# Altium PCB SPI-无线无线充.PcbDoc
Units mm, origin at the board's own origin, x right, y up, seen from the top; angles counter-clockwise.
Board outline 54.33 x 73.61 mm, 2 copper layers (Top Layer, Bottom Layer); 41 components, 35 nets, 129 pads, 63 vias.
Unrouted connection lines stored in the file: 1.
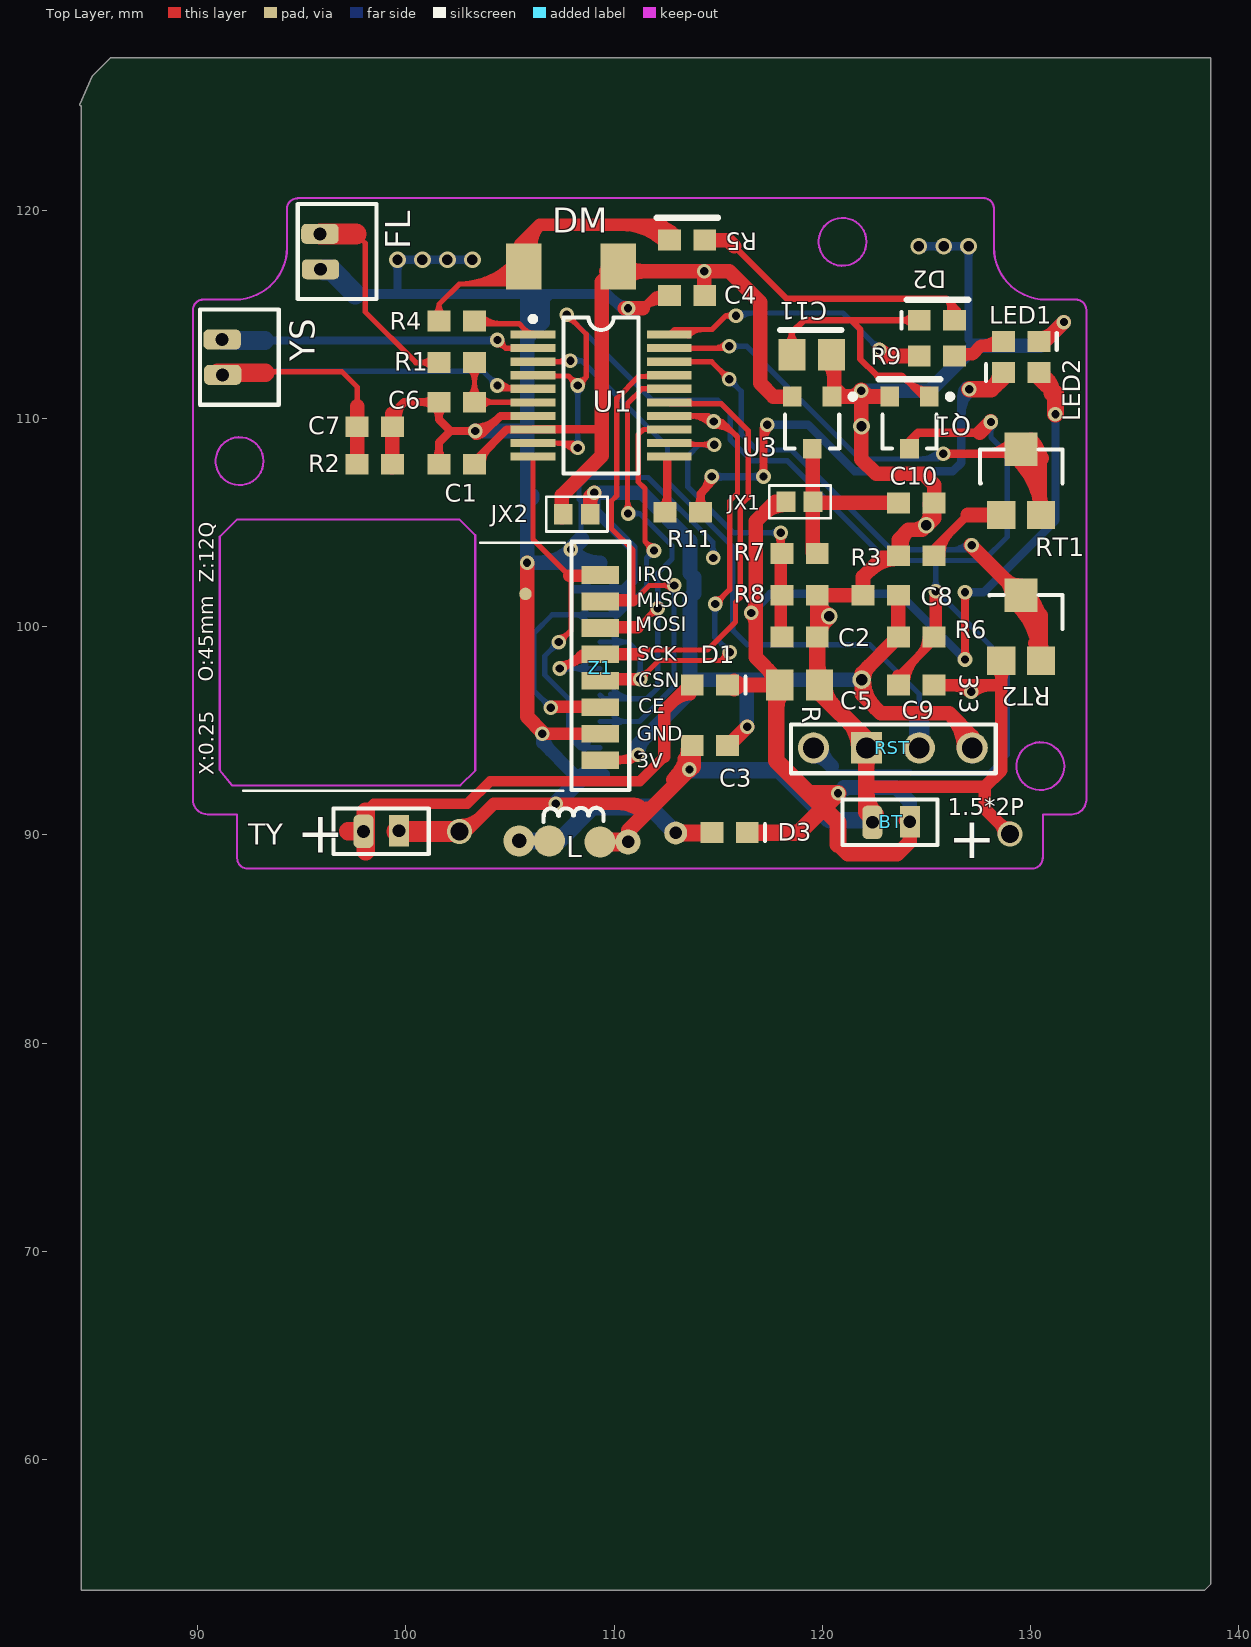
[diagram p0: Top Layer view]
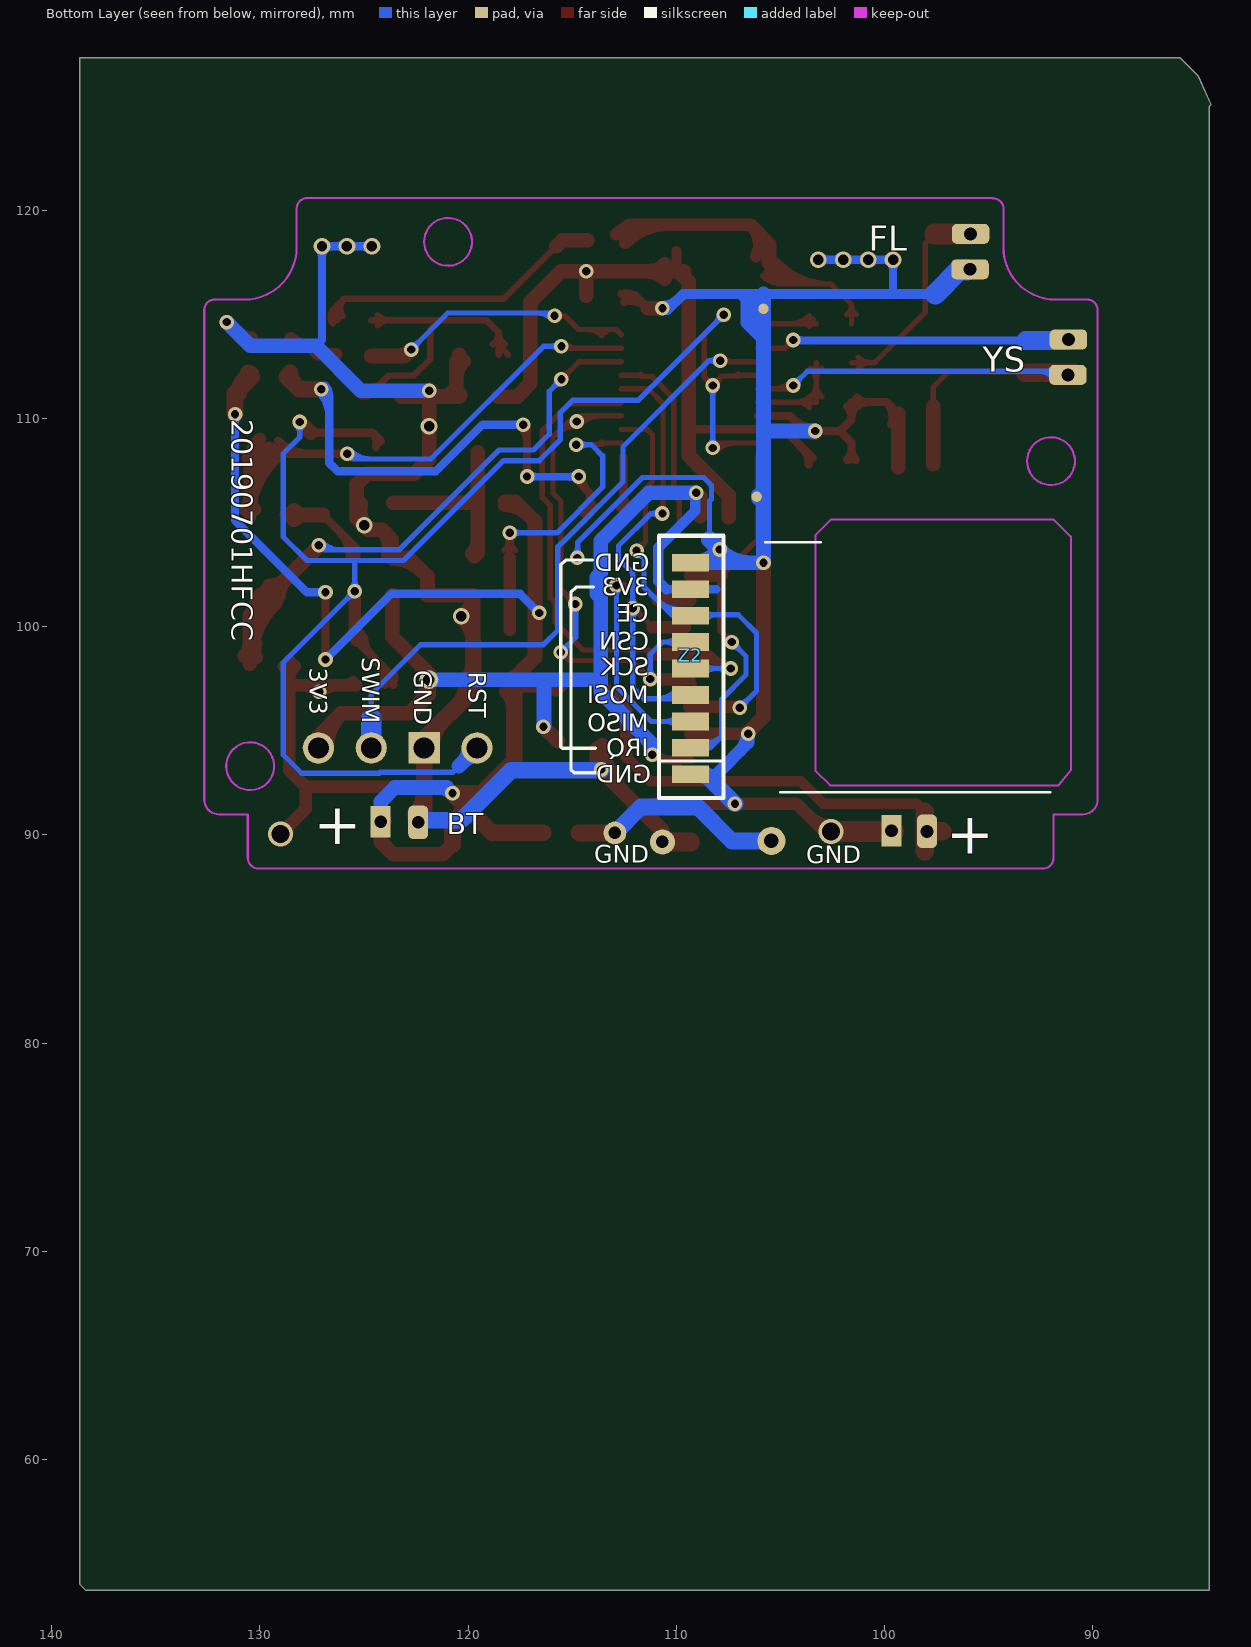
[diagram p1: Bottom Layer view, seen from below]

## Layer stack, top to bottom
Top Layer: signal copper 0.0356
Dielectric: dielectric 0.32, FR-4, Dk 4.8
Bottom Layer: signal copper 0.0356

## Board outline
84.328,125.07 84.404,124.993 84.404,53.721 138.354,53.721 138.659,54.026 138.659,127.33 85.827,127.33 84.938,126.441

## Design rules (kind name [scope] priority, off if disabled: settings)
Clearance [All] p1: gap=0.254
PolygonConnect [All] p1: connectstyle=Relief reliefconductorwidth=0.254 reliefentries=4 polygonreliefangle="90 Angle"
RoutingVias [All] p1: holewidth=0.711 width=1.27 viastyle="Through Hole" minholewidth=0.711 minwidth=1.27 maxholewidth=0.711 maxwidth=1.27
SilkscreenOverComponentPads [All] p1: minsilkscreentomaskgap=0.254
SolderMaskExpansion [All] p1: expansion=0.102
Width [All] p1: maxlimit=2 minlimit=0.254 preferedwidth=0.254 minimp=50.000000 maximp=50.000000 favimp=50.000000
27 further rules are at their usual default settings.

## Components (designator, comment, footprint, x,y, rotation, side; value= is the part's Value field where it differs from the comment)
BT "1.5*2P" MHDR1X2#1 123.932,90.635 r180 top
C1 "0.1uf" CR1608-0603 102.438,107.8 r180 top locked (schematic designator C6)
C2 "0.01uf" CR1608-0603 118.9,99.5 r180 top locked (schematic designator C12)
C3 "0.01uf" CR1608-0603 114.6,94.3 r0 top locked (schematic designator C10)
C4 "10uf" CR1608-0603 113.5,115.9 r180 top locked
C5 "33uf" CR2012-0805 118.9,97.2 r180 top locked (schematic designator R8)
C6 "0.01uf" CR1608-0603 102.438,110.782 r180 top locked
C7 "0.01uf" CR1608-0603 98.5,109.6 r0 top locked
C8 "0.1uf" CR1608-0603 122.8,101.509 r0 top locked
C9 "0.1uf" CR1608-0603 124.5,97.2 r180 top locked
C10 "10uf" CR1608-0603 124.5,105.943 r180 top locked (schematic designator C1)
C11 "33uf" CR2012-0805 119.482,113.055 r0 top locked (schematic designator R4)
D1 "SS14" CC1608-0603 114.6,97.2 r180 top (schematic designator D2)
D2 "SS14" CC1608-0603 125.5,114.716 r0 top locked (schematic designator 2D)
D3 "SS14" CC1608-0603 115.54,90.113 r180 top (schematic designator D2)
DM "3*4*2小龟按键" HDR1X2 111.8,115.3 r0 top locked (schematic designator FW)
FL "1.5*2P" MHDR1X2#2 95.872,118.7 r270 top locked (schematic designator BT)
JX1 "0" CR1005-0402 118.9,106 r180 top locked (schematic designator C3)
JX2 "0" CR1005-0402 108.2,105.4 r180 top locked (schematic designator C3)
LED1 "LED-R" CC1608-0603 129.55,113.7 r180 top locked (schematic designator R1)
LED2 "LED-G" CC1608-0603 129.55,112.2 r0 top locked (schematic designator R1)
Q1 "S8050" SO-G3/C2.5#1 124.181,109.8 r180 top locked (schematic designator U3)
R1 "1K" CR1608-0603 102.438,112.682 r0 top locked
R2 "1M" CR1608-0603 98.5,107.8 r0 top locked
R3 "100K" CR1608-0603 124.5,103.409 r0 top locked
R4 "10K" CR1608-0603 102.438,114.681 r0 top locked
R5 "1M" CR1608-0603 113.5,118.567 r0 top locked (schematic designator C4)
R6 "10K" CR1608-0603 124.5,99.5 r0 top locked (schematic designator R2)
R7 "180K" CR1608-0603 118.9,103.509 r0 top locked (schematic designator 7R)
R8 "360K" CR1608-0603 118.9,101.509 r180 top locked
R9 "1K" CR1608-0603 125.5,113 r0 top locked
R11 "470" CR1608-0603 113.3,105.5 r0 top locked (schematic designator R9)
RST "2.54*4" HDR1X4 119.572,94.182 r0 top locked (schematic designator Saoxie)
RT1 "50K" SO-G3/C2.5#2 129.54,107.264 r0 top locked (schematic designator U4)
RT2 "50K" SO-G3/C2.5#2 129.54,100.267 r0 top locked (schematic designator U4)
TY "1.5*2P" MHDR1X2#3 99.5,90.2 r180 top (schematic designator BT)
U1 "STM8L051F3P6" SSOP20 109.372,111.1 r270 top locked
U3 "XC6206 9v  6ua 250ma" SO-G3/C2.5#1 119.507,109.8 r180 top locked
YS "1.5*2P" MHDR1X2#2 91.172,113.63 r270 top locked (schematic designator BT)
Z1 "SI24R1" MHDR1X8 109.322,102.482 r270 top locked
Z2 "NRF24L01" MHDR1X8 109.322,94.182 r90 bottom locked

## Footprints (in the part's own frame and the unit in brackets; to place one, negate y for a bottom-side part, rotate by r counter-clockwise, add the part's x,y. Pads: shape width x height; smd on the part's side, far side on the other; paste and mask are expansions set on the pad)
CC1608-0603 [mm] "Chip Capacitor; Body 1.6 x 0.8 mm (LxW typ)"
  rect 1.1x1 smd: 1(-0.85,0) 2(0.85,0)
  silkscreen extent -1.7,-0.4 -1.7,0.4
CR1005-0402 [mm] "Ch"
  rect 0.9x1 smd: 1(-0.65,0) 2(0.65,0)
CR1608-0603 [mm] "Chip Resistor; Body 1.6 x 0.8 mm (LxW typ)"
  rect 1.1x1 smd: 1(-0.85,0) 2(0.85,0)
CR2012-0805 [mm] "Chip Resistor; Body 2.0 x 1.3 mm (LxW typ)"
  rect 1.3x1.5 smd: 1(-0.95,0) 2(0.95,0)
HDR1X2 [mm]
  rect 1.7x2.2 smd: 1(-6.147,2.004) 2(-1.6,2.004)
HDR1X4 [mm] "Connector; Header; 4 Position"
  round 1.5 hole 1: 1(0,0) 3(5.08,0) 4(7.62,0)
  rect 1.5x1.5 hole 1: 2(2.54,0)
  silkscreen extent -1.08,-1.22 8.75,1.12
MHDR1X2#1 [mm]
  rect 0.96x1.5 hole 0.62: 1(-0.264,0)
  rrect50% 0.96x1.6 hole 0.62: 2(1.536,0.026)
  silkscreen extent -1.6,-1.07 2.97,1.12
MHDR1X2#2 [mm]
  rrect50% 0.96x1.8 hole 0.62: 1(-0.164,0) 2(1.536,0.026)
  silkscreen extent -1.6,-1.07 2.97,2.72
MHDR1X2#3 [mm]
  rect 0.96x1.5 hole 0.62: 1(-0.164,0)
  rrect50% 0.96x1.6 hole 0.62: 2(1.536,0.026)
  silkscreen extent -1.6,-1.07 2.97,1.12
MHDR1X8 [mm] "Connector; Header; 8 Position"
  rect 0.85x1.8 smd: 1(0,0) 2(1.27,0) 3(2.54,0) 4(3.81,0) 5(5.08,0) 6(6.35,0) 7(7.62,0) 8(8.89,0)
  silkscreen extent -1.6,-1.36 10.33,1.4
SO-G3/C2.5#1 [mm]
  rect 0.9x0.95 smd: 1(-0.95,-1.25) 2(0.95,-1.25) 3(0,1.25)
  silkscreen extent -2.08,-1.37 1.3,1.25
SO-G3/C2.5#2 [mm]
  rect 1.35x1.35 smd: 1(-0.95,-1.9) 2(0.95,-1.9)
  rect 1.6x1.6 smd: 3(0,1.25)
  silkscreen extent -1.96,-0.38 1.99,1.25
SSOP20 [mm] "SSOP, Plastic; 20 Leads; Body Width 5.3 mm; Pitch 0.65 mm"
  rect 0.39x2.15 smd: 1(-2.925,-3.275) 2(-2.275,-3.275) 3(-1.625,-3.275) 4(-0.975,-3.275) 5(-0.325,-3.275) 6(0.325,-3.275) 7(0.975,-3.275) 8(1.625,-3.275) 9(2.276,-3.275) 11(2.925,3.275) 13(1.625,3.275) 15(0.325,3.275) 16(-0.325,3.275) 17(-0.975,3.275) 18(-1.625,3.275) 19(-2.275,3.275) 20(-2.925,3.275)
  rect 0.395x2.15 smd: 10(2.925,-3.275) 12(2.276,3.275) 14(0.975,3.275)
  silkscreen extent -3.8,-3.4 3.75,1.8

## Part data
C1 C2 C5 C6 C8 C10 LED1 LED2 R2 R6 R7 R8: library part Res3, "Resistor"
C3 C4 C7 C9 JX1 JX2 R5: library part "Cap Semi", "Capacitor (Semiconductor SIM Model)"
C11 D1 D2 D3 R1 R4: library part "Diode 1N4007", "1 Amp General Purpose Rectifier"
Q1 RT1 RT2 U3: library part QNPN, "NPN Bipolar Tra"
R3 R9 R11: library part "Cap Pol3"
RST: library part "Header 4", "Header, 4-Pin"
U1: library part ST6208CN6, "8-Bit ROM MCU with A/D Converter, Two Timers, Oscillator Safeguard and Safe Reset, 20-Pin SSOP, Industrial"

## Free pads (board coordinates)
  rect 1.8x0.85 smd far side: 0(109.322,92.912)
  round 1.35 hole 0.7: 1(105.435,89.713)
  round 1.2 hole 0.6: 1(110.668,89.662)
  round 1.1 hole 0.6: 1(112.954,90.094)
  round 0.9 hole 0.55: 1(121.884,97.46)
  round 1.5 smd: 3(105.435,89.713) 3(106.883,89.713) 3(109.322,89.662)
  round 0.6 smd: 3(105.74,101.575)
  round 0.5 smd far side: 4(105.816,115.265) 4(106.147,106.248)

## Via types
v1: diameter 0.7, hole 0.4, Top Layer to Bottom Layer, 51 vias
v2: diameter 0.8, hole 0.5, Top Layer to Bottom Layer, 10 vias
v3: diameter 1.2, hole 0.86, Top Layer to Bottom Layer, 2 vias

## Nets (pads, with @x,y where several pads share a name; then routed paths per layer and width w, separated by ;. In a path a pad name is that pad's centre, name@x,y a point inside that pad or via, vN(x,y) a via of type N, cw(c..) or ccw(c..) an arc to the next point about the centre after c; other vN are vias at no path point)
3V3: C1.1 C3.2 C4.1 C8.2 DM.2 JX2.1 JX2.2 pad.1@121.884,97.46 R6.1 RST.4 U1.8 U3.2 Z1.8 Z2.7 | length 99.9
  Top Layer w0.4: C1.1@103.448,108.113 103.474,108.113 104.834,109.473 U1.8@106.096,109.473 ; C1.1@103.638,107.8 cw(c104.789,107.8) 103.975,108.614 ; U1.8 109.474,109.475 ; Z1.8@109.322,93.599 110.795,93.599 ; Z1.8@109.956,93.433 cw(c110.357,93.032) 110.357,93.599 ; Z1.8@109.956,93.751 ccw(c110.323,94.118) 110.323,93.599 ; Z1.8@110.175,93.599 ccw(c110.175,94.828) v1@111.044,93.959 ; v1@111.126,93.705 ccw(c111.063,93.331) 110.795,93.599 ; v1(111.15,93.853) 111.049,93.853 110.795,93.599
  Top Layer w0.5: DM.2@109.995,117.17 DM.2@109.995,118.021
  Top Layer w0.7: JX2.2@107.493,105.247 107.493,106.299 109.398,108.204 109.398,116.573 DM.2@109.995,117.17 ; JX2.1@108.85,105.308 108.85,106.234 v1(109.042,106.426) ccw(c109.506,105.962) 108.85,105.962 ; DM.2@109.629,117.069 v1(114.325,117.069) ; DM.2@110.554,116.7 cw(c111.442,115.812) 111.442,117.069 ; DM.2@110.554,117.408 ccw(c111.372,118.226) 111.372,117.069 ; C4.1@114.325,115.9 v1(114.325,117.069) ; C3.2@115.684,94.5 v1(116.383,95.199) ; U3.2 117.652,111.05 117.018,111.684 117.018,115.57 115.519,117.069 v1(114.325,117.069) ; 122.262,98.132 ccw(c122.935,97.46) 121.984,97.46 ccw(c123.916,97.46) 122.55,96.094 ; C8.2 123.65,99.52 121.884,97.754 121.884,97.46 121.884,96.759 122.809,95.834 126.086,95.834 127.192,94.728 RST.4 ; 126.123,95.796 cw(c124.509,94.182) RST.4@126.792,94.182
  Bottom Layer w0.4: 108.078,101.802 110.491,101.802 ; Z2.7@108.688,101.643 ccw(c108.303,101.259) 108.303,101.802 ccw(c108.303,102.345) Z2.7@108.688,101.961 ; Z2.7@109.956,101.643 cw(c110.34,101.259) 110.34,101.802 cw(c110.34,102.345) Z2.7@109.956,101.961 ; RST.4@127.192,93.603 RST.4
  Bottom Layer w0.5: v1@108.971,106.355 cw(c108.678,106.062) 109.093,106.062 ; v1@109.093,106.426 109.093,105.562 110.871,103.784 110.871,102.182 110.491,101.802
  Bottom Layer w0.7: v1@109.093,106.426 111.336,106.426 113.64,104.122 113.64,102.568 113.832,102.376 113.832,101.586 113.64,101.394 113.64,96.85 111.15,94.361 v1(111.15,93.853) cw(c112.377,93.853) 111.51,94.72 ; 113.868,97.46 116.357,97.46 ; v1(116.383,95.199) 116.357,95.225 116.357,97.46 ; pad.1@121.884,97.46 116.357,97.46
4.2V: C10.2 JX1.1 R7.2 U3.3 | length 9.9
  Top Layer w0.39: JX1.1@119.532,106 JX1.1@119.589,105.943
  Top Layer w0.7: 119.532,104.176 ccw(c120.467,104.176) R7.2@119.806,103.515 ; U3.3@119.532,108.376 119.532,106 119.532,103.556 R7.2@119.71,103.378 ; JX1.1@119.589,105.943 C10.2@123.585,105.943
5V: D1.2 TY.2 | length 23
  Top Layer w0.5: 98.069,91.11 98.45,91.491 102.946,91.491 104.038,92.583 111.227,92.583 112.395,93.751
  Top Layer w0.6: 112.395,93.751 112.395,95.97 D1.2@113.65,97.225 ; 112.838,96.414 cw(c113.65,95.602) D1.2@113.65,96.75
  Top Layer w0.9: 97.231,90.174 TY.2@98.064,90.174 ; 98.069,89.23 98.069,91.11
BT: BT.1 C5.2 D1.1 D3.1 JX1.2 LED2.2 | length 80.5
  Top Layer w0.4: C5.2@117.78,97.2 C5.2 ; v1@126.742,98.531 ccw(c126.485,98.787) 126.848,98.787 ccw(c127.21,98.787) v1@126.954,98.531 ; v1@126.742,101.545 cw(c126.485,101.289) 126.848,101.289 cw(c127.21,101.289) v1@126.954,101.545 ; v1(126.848,98.425) v1(126.848,101.651)
  Top Layer w0.5: 117.768,96 117.78,96.012
  Top Layer w0.7: D1.1@115.55,97.2 C5.2@117.78,97.2 ; D1.1@115.762,96.988 cw(c116.274,96.476) 116.274,97.2 cw(c116.274,97.924) D1.1@115.762,97.412 ; 116.789,100.17 ccw(c116.095,100.17) v1(116.586,100.66) ccw(c116.095,101.151) 116.789,101.151 ; 117.114,105.38 cw(c118.25,104.244) JX1.2@118.25,105.85 ; C5.2@117.391,97.924 cw(c116.767,97.3) C5.2@117.65,97.3 ; C5.2@117.738,96.988 ccw(c117.226,96.476) 117.226,97.2 ccw(c117.226,97.924) C5.2@117.738,97.412 ; C5.2@117.78,97.536 116.789,98.527 116.789,105.054 117.735,106 JX1.2 ; 120.752,89.535 121.209,89.078 123.596,89.078 124.196,89.677 124.196,90.5 BT.1@123.996,90.7
  Top Layer w0.8: D3.1 118.866,90.113 120.053,91.3 ; 117.78,96.086 cw(c118.964,96.086) C5.2@118.127,96.923 ; C5.2@117.78,97.536 117.78,97.2 117.78,96.012 117.78,93.574 119.355,91.999 ; 120.752,89.535 120.752,90.602 120.053,91.3 ; LED2.2@130.4,112 131.013,111.387 131.013,111.379 131.191,111.201 v1(131.191,110.2) ; LED2.2@130.411,112.108 cw(c130.034,111.204) 131.013,111.204 ; LED2.2@130.412,112.107 cw(c130.044,111.211) 131.013,111.211 ; 130.797,111.603 cw(c131.395,112.2) LED2.2@130.55,112.2 ; 119.355,91.999 120.053,91.3 ; 119.355,91.999 v1(120.752,91.999) 120.053,91.3 ; LED2.2@130.55,112.2 ccw(c131.414,112.2) 130.803,111.589 cw(c131.414,112.2) LED2.2@130.55,112.2
  Bottom Layer w0.4: v1(116.586,100.66) 117.5,101.575 123.698,101.575 v1(126.848,98.425) ; v1@116.586,100.81 ccw(c116.586,101.172) 116.842,100.916 ccw(c117.098,100.66) v1@116.736,100.66 ; v1@126.698,98.425 ccw(c126.335,98.425) 126.592,98.681 ccw(c126.848,98.937) v1@126.848,98.575 ; v1(126.848,101.651) 127.737,101.651 131.191,105.105 v1@131.191,110.007 ; v1@126.954,101.545 cw(c127.21,101.289) 127.21,101.651 cw(c127.21,102.013) v1@126.954,101.757 ; v1@131.085,110.094 cw(c130.829,109.838) 131.191,109.838 cw(c131.553,109.838) v1@131.297,110.094
  Bottom Layer w0.7: 121.426,92.278 ccw(c121.426,91.324) v1(120.752,91.999) 121.031,92.278 123.52,92.278 124.196,91.602 BT.1
CE: U1.13 Z1.6 Z2.6 | length 28.1
  Top Layer w0.254: v1@111.689,103.657 ccw(c111.151,103.657) 111.532,104.038 ccw(c111.912,104.419) v1@111.912,103.88 ; v1(111.912,103.657) 111.481,104.089 111.481,106.629 111.15,106.959 111.15,109.22 111.405,109.475 U1.13
  Top Layer w0.6: v1@107.01,96.164 Z1.6@109.372,96.164
  Bottom Layer w0.254: v1@106.736,96.114 ccw(c106.198,96.114) 106.579,96.494 ccw(c106.959,96.875) v1@106.959,96.337 ; v1(106.959,96.114) 106.152,96.921 106.152,99.701 107.028,100.576 110.228,100.576 ; 108.021,100.576 cw(c108.021,99.706) Z2.6@108.636,100.321 ; 108.234,100.576 ccw(c108.234,101.145) Z2.6@108.636,100.743 ; Z2.6@109.797,100.576 ccw(c109.797,101.617) 110.533,100.881 ; Z2.6@109.797,100.83 ccw(c109.797,102.485) 110.967,101.315 ; Z2.6@110.057,100.677 ccw(c110.228,100.772) 110.228,100.576 ; Z2.6@110.087,100.464 cw(c110.228,100.431) 110.228,100.576 ; v1@111.69,103.646 cw(c111.235,103.624) 111.557,103.302 ; v1@111.901,103.435 ccw(c111.879,102.98) 111.557,103.302 ; v1(111.912,103.657) 111.557,103.302 ; 110.228,100.576 111.557,101.905 111.557,103.302
CSN: U1.14 Z1.5 Z2.5 | length 36.5
  Top Layer w0.254: Z1.5@109.144,97.257 Z1.5@109.372,97.485 ; v1(111.252,97.485) 112.141,98.374 115.138,98.374 v1(115.545,98.781) ; v1@111.252,97.708 ccw(c111.252,98.247) 111.633,97.866 ccw(c112.013,97.485) v1@111.475,97.485 ; U1.14 114.513,110.124 ; U1.14@113.594,110.124 cw(c113.594,108.666) v1@114.625,109.697 ; 114.207,110.124 cw(c114.207,109.279) v1@114.805,109.877 ; v1@114.568,109.915 ccw(c114.362,109.973) 114.513,110.124 ; v1@114.722,110.07 cw(c114.665,110.276) 114.513,110.124 ; v1@114.783,109.632 cw(c114.783,108.112) 115.857,109.187 ; v1@114.783,109.886 cw(c114.783,108.98) 115.423,109.621 ; v1(114.859,101.092) 115.545,101.778 115.545,106.027 115.926,106.408 115.926,109.118 115.189,109.855 ; v1@114.859,101.315 ccw(c114.859,101.853) 115.239,101.473 ccw(c115.62,101.092) v1@115.082,101.092 ; v1@114.971,109.735 cw(c115.189,109.596) 115.189,109.855 ; v1@114.971,109.975 ccw(c115.189,110.114) 115.189,109.855 ; v1@115.322,98.781 cw(c114.783,98.781) 115.164,98.4 cw(c115.545,98.019) v1@115.545,98.558 ; 114.513,110.124 v1(114.783,109.855) 115.189,109.855
  Top Layer w0.6: Z1.5@109.372,97.485 v1(111.252,97.485) ; Z1.5@109.885,97.314 cw(c110.299,96.899) 110.299,97.485
  Bottom Layer w0.254: Z2.5 110.669,99.262 111.252,98.679 v1(111.252,97.485) ; Z2.5@110.007,99.051 cw(c110.516,98.543) 110.516,99.262 cw(c110.516,99.981) Z2.5@110.007,99.473 ; v1@111.094,97.643 ccw(c110.714,98.024) 111.252,98.024 ccw(c111.79,98.024) v1@111.41,97.643 ; v1@114.701,100.934 cw(c114.382,100.615) 114.833,100.615 ; 114.833,100.492 cw(c115.458,100.492) v1@115.016,100.934 ; v1(114.859,101.092) 114.833,101.067 114.833,99.492 v1(115.545,98.781) ; v1@115.322,98.781 ccw(c114.783,98.781) 115.164,99.161 ccw(c115.545,99.542) v1@115.545,99.004
DM: DM.1 R4.1 R5.1 | length 32.8
  Top Layer w0.254: R4.1@101.348,114.967 ccw(c100.915,115.482) 101.588,115.482 ; R4.1@101.588,114.554 101.588,115.482 ; R4.1@101.828,114.967 cw(c102.261,115.482) 101.588,115.482 ; 103.16,116.459 ccw(c103.16,119.442) DM.1@105.314,117.378 ; 103.755,116.459 ccw(c103.755,118.872) DM.1@105.498,117.203 ; 104.35,116.459 ccw(c104.35,118.302) DM.1@105.681,117.027 ; DM.1@104.946,116.459 ccw(c104.946,117.732) DM.1@105.865,116.851 ; DM.1@105.131,117.554 cw(c102.565,120.012) 102.565,116.459 ; DM.1@105.156,117.142 105.156,116.56 105.054,116.459 102.565,116.459 ; 101.588,115.482 102.565,116.459
  Top Layer w0.6: DM.1@105.486,117.45 105.486,118.364 106.426,119.304 ; DM.1@105.608,117.533 cw(c106.546,117.964) 105.816,118.694 ; DM.1@106.153,117.783 cw(c107.382,118.347) 106.426,119.304 ; 110.339,119.304 cw(c110.339,116.306) R5.1@112.459,118.426 ; 111.787,119.304 cw(c111.787,117.755) R5.1@112.883,118.85 ; R5.1@112.413,118.637 ccw(c111.822,118.858) 112.268,119.304 ; R5.1@112.573,118.821 112.573,118.999 112.268,119.304 ; 106.426,119.304 112.268,119.304
  Top Layer w0.8: DM.1@105.156,117.12 DM.1@105.486,117.45
DM-D: R4.2 U1.1 | length 5.6
  Top Layer w0.254: R4.2@103.288,114.554 105.427,114.554 105.681,114.3 105.681,114.025 U1.1 ; R4.2@103.422,114.765 ccw(c103.932,115.275) 103.932,114.554 ccw(c103.932,114.087) R4.2@103.602,114.417 ; R4.2@103.602,114.945 ccw(c104.545,115.888) 104.545,114.554 ; 105.741,114.24 ccw(c106.097,114.597) U1.1@106.097,114.093
DYKG: 
DYKZ: 
FL: C6.1 R1.2 U1.6 | length 9
  Top Layer w0.254: C6.1@103.024,111.046 ccw(c102.387,111.682) 103.288,111.682 ccw(c104.188,111.682) C6.1@103.552,111.046 ; R1.2@103.024,112.418 cw(c102.387,111.782) 103.288,111.782 cw(c104.188,111.782) R1.2@103.552,112.418 ; R1.2 C6.1 104.673,110.782 104.681,110.774 U1.6 ; C6.1@103.602,110.518 cw(c104.238,109.881) 104.238,110.782 cw(c104.238,111.682) C6.1@103.602,111.046
FL-IN: FL.1 R1.1 | length 11.5
  Top Layer w0.254: 97.695,118.764 98.044,118.415 98.044,115.113 100.475,112.682 R1.1 ; R1.1@101.274,112.418 ccw(c100.638,111.782) 100.638,112.682 ccw(c100.638,113.583) R1.1@101.274,112.946
  Top Layer w1: FL.1 97.595,118.864
FL-RT: RT1.2 RT1.3 U1.19 | length 38.6
  Top Layer w0.254: U1.19@112.662,113.36 U1.19 115.432,113.375 v1(115.519,113.462) ; 114.77,113.375 ccw(c114.77,114.211) v1@115.362,113.619
  Top Layer w0.4: v1(125.806,108.306) RT1.3@129.489,108.306 ; v1@125.912,108.2 cw(c126.168,107.943) 126.168,108.306 cw(c126.168,108.668) v1@125.912,108.412 ; 127.588,108.306 ccw(c127.588,110.466) RT1.3@129.116,108.938 ; 128.554,108.306 ccw(c128.554,109.5) RT1.3@129.399,108.656 ; 128.595,108.306 cw(c128.595,107.569) RT1.3@129.116,108.09
  Top Layer w0.6: RT1.3@129.203,108.145 cw(c126.533,105.224) RT1.2@130.49,105.224 ; RT1.3@129.607,108.588 cw(c127.777,106.586) 130.49,106.586 ; RT1.3@130.012,109.031 cw(c129.022,107.947) 130.49,107.947 ; RT1.2@130.225,105.629 ccw(c129.585,106.27) 130.49,106.27 ccw(c131.395,106.27) RT1.2@130.755,105.629 ; RT1.2 130.49,108.092
  Top Layer w0.7: RT1.3@129.489,108.306 RT1.3@129.54,108.356
  Top Layer w0.8: RT1.3@129.753,108.175 cw(c130.069,107.671) 130.49,108.092 RT1.3@130.068,108.514
  Bottom Layer w0.254: v1(115.519,113.462) 116.383,113.462 121.793,108.052 125.552,108.052 v1(125.806,108.306) ; v1@115.677,113.304 cw(c116.058,112.923) 116.058,113.462 cw(c116.058,114) v1@115.677,113.619 ; 124.655,108.052 ccw(c124.655,109.457) v1@125.649,108.463 ; 125.268,108.052 ccw(c125.268,108.844) v1@125.828,108.284
GND: BT.2 C1.2 C2.1 C3.1 C4.2 C5.1 C6.2 C7.2 C8.1 C9.1 C10.1 C11.2 FL.2 LED1.1 pad.0 pad.1@110.668,89.662 pad.3@105.74,101.575 pad.3@109.322,89.662 pad.4 Q1.2 R2.2 R3.1 R8.1 RST.2 RT2.1 TY.1 U1.7 U3.1 Z1.7 Z2.8 | length 260.1
  Top Layer w0.39: C7.2@99.321,109.569 cw(c100.01,109.836) 99.487,110.359 ; 99.35,110.221 99.911,110.782 ; C7.2@99.684,109.71 cw(c100.62,110.072) 99.911,110.782 ; C6.2@101.322,110.566 ccw(c100.802,110.046) 100.802,110.782 ccw(c100.802,111.518) C6.2@101.322,110.998 ; C1.2@101.372,108.016 ccw(c100.852,108.536) 101.588,108.536 ccw(c102.324,108.536) C1.2@101.804,108.016 ; C6.2@101.372,110.566 cw(c100.852,110.046) 101.588,110.046 cw(c102.324,110.046) C6.2@101.804,110.566 ; C1.2@101.588,108.039 101.588,108.852 102.133,109.398 ; v1@103.218,109.288 ccw(c102.953,109.024) 102.953,109.398 ccw(c102.953,109.772) v1@103.218,109.507 ; v1@103.327,109.163 ccw(c103.327,109.761) 103.75,109.338 ; v1@103.327,109.553 ccw(c103.327,111.092) 104.416,110.004 ; v1@103.437,109.288 cw(c103.701,109.024) 103.701,109.398 cw(c103.701,109.772) v1@103.437,109.507 ; U1.7 104.537,110.125 103.81,109.398 v1(103.327,109.398) 102.133,109.398 ; v1@110.515,115.291 v1(110.668,115.291) ; 111.849,115.772 cw(c112.419,115.203) C4.2@112.621,115.982 ; 111.977,115.9 111.367,115.291 cw(c112.22,114.438) C4.2@112.523,115.605 ; RT2.1@128.25,98.028 cw(c127.431,97.208) 128.59,97.208 cw(c129.749,97.208) RT2.1@128.929,98.028 ; 128.59,97.18 RT2.1 ; 99.911,110.782 C6.2 101.588,109.943 102.133,109.398
  Top Layer w0.6: v3(102.565,90.17) 102.895,90.17 104.216,91.491 110.947,91.491 ; v3@102.565,90.47 ccw(c102.565,91.991) 103.641,90.916 ; v1@106.553,94.931 106.622,94.862 Z1.7 ; 110.174,91.491 cw(c110.174,89.674) 111.459,90.959 ; 111.401,91.08 ccw(c110.947,91.035) 110.947,91.491 ; 111.565,91.297 cw(c111.442,91.985) 110.947,91.491 ; 122.352,92.304 127.787,92.304 ; C9.1@125.374,97.18 128.59,97.18 ; C9.1@125.541,97.341 ccw(c125.93,97.73) 125.93,97.18 ; 126.296,97.18 cw(c126.296,96.019) v1@127.117,96.84 ; v1@127.188,96.84 cw(c128.009,96.019) 128.009,97.18 ; RT2.1@128.325,98.102 cw(c127.685,97.462) 128.59,97.462 cw(c129.495,97.462) RT2.1@128.855,98.102 ; RT2.1 128.59,93.106 127.787,92.304 ; v3@128.707,90.043 ccw(c127.982,90.043) 128.494,90.555 ccw(c129.007,91.067) v3@129.007,90.343 ; v3(129.007,90.043) 127.787,91.262 127.787,92.304
  Top Layer w0.7: R2.2@99.35,107.66 99.35,110.221 ; v1(105.816,103.072) 105.816,95.668 v1@106.553,94.931 ; v1@110.515,115.291 111.367,115.291 ; 111.658,91.211 110.668,90.221 110.668,89.662 110.668,90.17 v1@113.767,93.269 ; 112.847,92.657 cw(c113.816,91.973) v1(113.614,93.142) ; 112.901,92.734 ccw(c111.335,94.3) C3.1@113.55,94.3 ; 113.094,92.926 cw(c113.614,92.406) v1(113.614,93.142) ; 113.403,93.648 ccw(c113.866,93.544) v1(113.614,93.142) ; 113.767,93.599 ccw(c114.148,93.218) v1(113.614,93.142) ; C2.1@119.75,99.129 cw(c121.532,99.129) v2@120.359,100.47 ; C2.1@119.75,99.255 R8.1 ; C2.1@119.75,99.709 C2.1 119.761,99.489 119.761,101.295 ccw(c120.523,101.295) v2@120.338,100.556 ; C2.1@119.761,99.343 cw(c121.122,99.343) v2@120.354,100.467 ; C11.2@120.219,112.743 cw(c119.364,111.888) 120.574,111.888 ; v2@120.348,100.553 cw(c120.814,101.509) R8.1 ; U3.1@120.386,111.146 ccw(c119.934,111.598) 120.574,111.598 ; U3.1@120.432,111.054 121.006,111.054 ; C11.2 120.432,112.605 120.574,112.748 120.574,111.486 121.006,111.054 ; 121.208,111.054 ccw(c121.208,111.99) v1(121.869,111.328) ccw(c122.531,111.99) 122.531,111.054 ; 122.263,102.705 cw(c123.6,101.369) R3.1@123.6,103.259 ; 122.996,103.309 ccw(c122.996,104.013) R3.1@123.494,103.515 ; Q1.2@123.205,111.054 v1@121.869,111.054 ; R3.1@123.843,103.455 cw(c124.961,103.817) 124.13,104.648 ; 124.321,104.648 ccw(c124.321,105.549) 124.958,104.912 ccw(c123.985,105.885) C10.1@125.361,105.885 ; C10.1@125.154,105.91 cw(c123.83,105.608) v2@124.79,104.648 ; LED1.1@130.45,113.85 ccw(c130.45,114.737) 131.077,114.11 ; LED1.1@130.503,113.536 v1(131.597,114.63) ; R8.1 C8.1 121.95,102.392 122.867,103.309 123.661,103.309 123.661,104.179 124.13,104.648 ; 121.006,111.054 v1@121.869,111.054 ; v1@121.869,111.054 121.869,108.052 122.58,107.34 124.841,107.34 125.361,106.82 125.361,105.219 v2@124.79,104.648 ; 124.13,104.648 v2@124.79,104.648
  Top Layer w0.8: v1(113.614,93.142) v1@113.614,93.167 ; v1@113.767,93.269 C3.1@113.767,94.106 ; 119.75,98.145 ccw(c120.695,98.145) C5.1@120.027,97.477 ; C2.1@119.75,99.255 119.75,96.963 122.112,94.601 RST.2 122.112,91.088 BT.2@122.5,90.7 ; C5.1@120.1,97.1 ccw(c121.276,97.1) 120.445,96.268 ; 121.218,95.494 cw(c119.906,94.182) RST.2@121.762,94.182 ; RST.2@121.865,93.935 cw(c121.267,93.337) 122.112,93.337 cw(c122.957,93.337) RST.2@122.36,93.935 ; v1@121.869,111.054 v1(121.869,111.328) ; 122.112,92.049 ccw(c123.615,92.049) BT.2@122.552,90.986
  Top Layer w0.9: pad.3@109.322,89.662 pad.1@110.668,89.662
  Top Layer w1: TY.1@99.564,90.17 v3(102.565,90.17)
  Bottom Layer w0.254: 108.407,104.191 108.407,106.027 108.311,106.123 108.311,106.787 108.687,107.163 111.633,107.163 114.732,104.064 114.732,103.327 v1(114.757,103.302) ; v1@114.6,103.459 ccw(c114.28,103.779) 114.732,103.779 ; 114.732,103.901 ccw(c115.357,103.901) v1@114.915,103.459
  Bottom Layer w0.4: v2@99.452,117.486 cw(c99.111,117.145) 99.593,117.145 cw(c100.076,117.145) 99.735,117.486 cw(c100.076,117.145) 100.076,117.627 cw(c100.076,118.11) v2@99.735,117.769 ; 99.517,115.976 99.593,116.053 v2(99.593,117.627) v2(100.793,117.627) v2(101.993,117.627) v2(103.193,117.627) ; v2@100.652,117.486 ccw(c100.311,117.145) 100.311,117.627 ccw(c100.311,118.11) v2@100.652,117.769 ; v2@100.935,117.486 cw(c101.276,117.145) 101.276,117.627 cw(c101.276,118.11) v2@100.935,117.769 ; v2@101.852,117.486 ccw(c101.511,117.145) 101.511,117.627 ccw(c101.511,118.11) v2@101.852,117.769 ; v2@102.135,117.486 cw(c102.476,117.145) 102.476,117.627 cw(c102.476,118.11) v2@102.135,117.769 ; v2@103.052,117.486 ccw(c102.711,117.145) 102.711,117.627 ccw(c102.711,118.11) v2@103.052,117.769 ; v2(124.619,118.262) v2(125.819,118.262) v2(127.019,118.262) 127.019,113.773 127.305,113.487 ; v2@124.76,118.121 cw(c125.101,117.78) 125.101,118.262 cw(c125.101,118.745) v2@124.76,118.404 ; v2@125.677,118.121 ccw(c125.336,117.78) 125.336,118.262 ccw(c125.336,118.745) v2@125.677,118.404 ; v2@125.96,118.121 cw(c126.301,117.78) 126.301,118.262 cw(c126.301,118.745) v2@125.96,118.404 ; v2@126.877,118.404 cw(c126.536,118.745) 126.536,118.262 cw(c126.536,117.78) 126.877,118.121 cw(c126.536,117.78) 127.019,117.78 cw(c127.501,117.78) v2@127.16,118.121
  Bottom Layer w0.5: FL.2@95.898,117.264 FL.2@96.04,117.122 ; 97.565,115.976 99.517,115.976 105.816,115.976 106.375,115.976 ; TY.1@99.636,89.916 TY.1@99.636,89.941 ; 105.816,113.741 106.68,114.605 106.68,115.748 106.909,115.976 ; 105.924,115.525 ccw(c106.184,115.265) pad.4@105.816,115.265 ; 105.943,114.959 ccw(c105.51,114.959) pad.4@105.816,115.265 ; 106.147,115.468 105.943,115.265 105.943,114.3 106.375,114.732 106.375,115.976 ; 108.078,92.912 108.939,92.912 pad.0 pad.0@109.546,92.912 ; 109.977,115.677 ccw(c110.668,116.368) v1@110.668,115.391 ; v1(110.668,115.291) 110.515,115.291 110.439,115.214 109.677,115.976 106.909,115.976 ; pad.4@105.816,115.265 105.816,115.418 106.375,115.976 ; 106.375,115.976 106.909,115.976
  Bottom Layer w0.6: v1(106.553,94.862) 106.553,94.437 108.078,92.912 ; v1@106.603,94.862 ccw(c107.749,94.862) 106.939,94.051 ; pad.0@108.609,92.912 pad.0@108.939,92.912
  Bottom Layer w0.7: v1(103.327,109.398) 105.791,109.398 ; 105.816,105.692 cw(c106.702,105.692) pad.4@106.076,106.319 ; 105.816,106.804 ccw(c106.702,106.804) pad.4@106.076,106.177 ; pad.4@105.816,115.265 105.816,113.741 v1(105.816,103.072) Z2.8 cw(c109.322,104.924) v1(107.925,103.708) cw(c106.389,105.244) 106.389,103.072 ; pad.4@105.816,115.418 105.816,115.976 ; v1(121.869,111.328) 125.146,111.328 127.305,113.487 130.454,113.487 v1(131.597,114.63)
  Bottom Layer w0.8: v1(107.188,91.491) pad.0@108.609,92.912 ; v1(107.925,103.708) 108.407,104.191 ; 108.399,92.701 cw(c108.847,92.254) pad.0@108.847,92.887 ; v1@113.614,93.1 117.949,93.1 120.349,90.7 BT.2@122.496,90.7
  Bottom Layer w1: FL.2@96.04,117.122 96.419,117.122 97.565,115.976
  other v1: 127.152,96.876
  other v2: 120.326,100.508 124.993,104.877 121.875,109.626
IRQ: U1.10 Z1.1 Z2.1 | length 22.5
  Top Layer w0.254: U1.10 106.097,104.189 107.848,102.438 ; v1@107.34,99.486 ccw(c107.34,100.086) 107.764,99.662 ; v1@107.353,99.251 107.925,99.822 107.925,102.159 108.204,102.438 ; v1@107.563,99.263 cw(c108.04,99.263) 107.703,99.601
  Top Layer w0.6: 107.848,102.438 Z1.1@109.322,102.438
  Bottom Layer w0.254: v1@107.117,99.263 cw(c106.579,99.263) 106.96,98.883 cw(c107.34,98.502) v1@107.34,99.04 ; v1(107.34,99.263) 106.66,98.583 106.66,97.69 107.817,96.533 107.817,94.748 ; 108.141,94.424 ccw(c108.668,94.951) Z2.1@108.837,94.225 ; Z2.1@108.575,94.058 ccw(c108.383,93.97) 108.383,94.182 ; Z2.1@108.575,94.306 cw(c108.383,94.394) 108.383,94.182 ; Z2.1@108.779,94.472 cw(c108.546,95.477) 107.817,94.748 ; Z2.1 108.383,94.182 ; 107.817,94.748 108.383,94.182
L+: 
L-: D3.2 pad.1@105.435,89.713 pad.1@112.954,90.094 pad.3@105.435,89.713 pad.3@106.883,89.713 | length 10.5
  Top Layer w0.8: pad.1@112.954,90.094 114.67,90.094 D3.2
  Bottom Layer w0.8: pad.1@105.435,89.713 107.34,89.713 108.966,91.338 111.709,91.338 pad.1@112.954,90.094
L-R-R: LED1.2 R9.2 | length 4.1
  Top Layer w0.6: R9.2@126.324,113.081 127.203,113.081 127.622,113.5 LED1.2@128.7,113.5 ; R9.2@126.541,112.859 cw(c127.078,112.322) 127.078,113.081 ; 127.684,113.5 ccw(c127.684,114.666) LED1.2@128.509,113.841
LED2: R11.1 U1.11 | length 3.7
  Top Layer w0.4: R11.1@112.288,105.712 ccw(c111.661,106.339) 112.547,106.339 ; R11.1@112.547,105.551 U1.11@112.547,108.153 ; 112.547,106.109 ccw(c113.109,106.109) R11.1@112.712,105.712
LED2-R: LED2.1 R11.2 | length 31.4
  Top Layer w0.4: R11.2@113.938,105.712 ccw(c113.426,106.224) 114.15,106.224 ccw(c114.874,106.224) R11.2@114.362,105.712 ; 114.317,106.568 ccw(c113.657,107.145) v1@114.531,107.203 ; R11.2@114.427,105.422 114.15,105.699 114.15,106.377 v1@114.859,107.188 ; v1@117.064,107.319 ccw(c116.808,107.576) 117.17,107.576 ccw(c117.532,107.576) v1@117.276,107.319 ; v1(117.17,107.213) 117.17,109.525 v1(117.348,109.703) ; 117.17,108.911 cw(c118.139,108.911) v1@117.454,109.597
  Top Layer w0.8: v1(127.051,111.404) 128.104,111.404 LED2.1@128.7,112 ; 128.303,111.603 ccw(c127.705,112.2) LED2.1@128.55,112.2
  Bottom Layer w0.4: v1@114.786,107.321 ccw(c115.104,107.646) 115.109,107.191 ; v1@114.859,107.188 v1(117.17,107.213) ; v1@117.063,107.318 cw(c116.804,107.572) 116.808,107.209 cw(c116.812,106.847) v1@117.065,107.106 ; v1(117.348,109.703) 119.304,109.703 121.539,107.467 126.263,107.467 126.67,107.874 126.67,111.023 v1(127.051,111.404) ; v1@117.454,109.597 cw(c117.71,109.34) 117.71,109.703 cw(c117.71,110.065) v1@117.454,109.809 ; 126.67,110.122 cw(c128.333,110.122) v1@127.157,111.298 ; 126.67,110.866 cw(c127.059,110.866) v1@127.053,111.254 ; 126.67,111.088 cw(c127.367,111.088) v1@126.874,111.581 ; v1@126.901,111.404 cw(c126.539,111.404) 126.795,111.148 cw(c127.051,110.892) v1@127.051,111.254
  other v1: 114.681,107.213
MISO: U1.17 Z1.2 Z2.2 | length 29.8
  Top Layer w0.254: 110.896,101.27 110.896,103.683 109.861,104.719 109.861,106.025 110.129,106.293 110.129,110.967 111.175,112.014 111.699,112.014 111.76,112.075 U1.17 ; 110.973,101.27 111.684,101.981 v1(112.878,101.981) ; 111.456,112.014 ccw(c111.456,112.386) U1.17@111.719,112.123 ; v1@112.72,101.823 ccw(c112.339,101.443) 112.339,101.981 ccw(c112.339,102.519) v1@112.72,102.139
  Top Layer w0.6: Z1.2@109.322,101.27 110.896,101.27 ; Z1.2@109.885,101.124 cw(c110.238,100.771) 110.238,101.27
  Bottom Layer w0.254: Z2.2 111.208,95.452 112.878,97.122 v1(112.878,101.981) v1@112.725,101.981 ; Z2.2@110.007,95.241 cw(c110.516,94.733) 110.516,95.452 cw(c110.516,96.171) Z2.2@110.007,95.663 ; v1@112.72,101.823 cw(c112.339,101.443) 112.878,101.443 cw(c113.416,101.443) v1@113.035,101.823
MOSI: U1.16 Z1.3 Z2.3 | length 29.2
  Top Layer w0.254: v1@110.51,105.593 ccw(c110.191,105.912) 110.642,105.912 ; v1@110.642,105.435 110.642,110.719 111.348,111.425 U1.16 ; 110.642,106.035 ccw(c111.267,106.035) v1@110.825,105.593 ; 111.125,99.974 v1@112.065,100.914 ; 111.623,100.472 cw(c112.09,100.005) v1@112.09,100.666 ; 111.745,100.595 ccw(c111.451,100.889) v1@111.867,100.889
  Top Layer w0.6: Z1.3@109.601,99.974 111.125,99.974
  Bottom Layer w0.254: Z2.3 109.498,96.545 111.583,96.545 112.09,97.053 112.09,102.565 112.776,103.251 112.776,103.886 111.227,105.435 v1(110.668,105.435) ; Z2.3@109.828,96.753 ccw(c110.329,97.255) 110.329,96.545 ; Z2.3@110.007,96.933 ccw(c110.942,97.868) 110.942,96.545 ; v1@110.825,105.278 cw(c111.206,104.897) 111.206,105.435 cw(c111.206,105.974) v1@110.825,105.593 ; v1@111.933,100.731 cw(c111.552,100.35) 112.09,100.35 cw(c112.629,100.35) v1@112.248,100.731 ; v1@111.933,101.046 ccw(c111.552,101.427) 112.09,101.427 ccw(c112.629,101.427) v1@112.248,101.046
  other v1: 112.09,100.889
PB7: C2.2 R7.1 R8.2 U1.12 | length 22.4
  Top Layer w0.254: U1.12 113.68,108.824 113.754,108.75 ; U1.12@113.566,108.766 cw(c113.65,108.647) 113.754,108.75 ; U1.12@113.575,108.874 ccw(c113.873,109.172) 113.873,108.75 ; U1.12@113.588,108.854 ccw(c113.754,108.933) 113.754,108.75 ; 114.238,108.75 cw(c114.238,108.167) v1@114.65,108.58 ; 114.301,108.75 ccw(c114.301,109.244) v1@114.65,108.895 ; v1@114.808,108.585 v1(114.808,108.737) ; v1@114.808,108.75 113.754,108.75 ; R7.1@117.736,103.673 ccw(c117.107,104.3) v1@117.996,104.301 ; v1@117.818,104.374 cw(c117.422,104.075) R7.1@117.901,103.947 ; v1@117.838,104.35 cw(c117.458,103.97) 117.996,103.97 cw(c118.534,103.97) v1@118.154,104.351 ; v1@117.884,104.315 cw(c117.7,103.994) 118.057,104.09 ; 117.942,104.099 cw(c118.285,104.008) v1@118.107,104.315 ; v1@117.996,104.318 ccw(c118.908,104.319) R7.1@118.264,103.673 ; v1(117.996,104.508) R7.1@117.997,103.309 ; R7.1@118.096,103.944 cw(c118.591,104.077) v1@118.176,104.377
  Top Layer w0.6: C2.2@117.997,99.847 R7.1@117.997,103.309
  Bottom Layer w0.254: v1@114.65,108.58 ccw(c114.27,108.199) 114.27,108.737 ccw(c114.27,109.276) v1@114.65,108.895 ; v1(114.808,108.737) 114.071,108.737 113.538,108.204 113.538,106.705 115.735,104.508 v1(117.996,104.508) ; v1@117.838,104.351 ccw(c117.457,103.97) 117.457,104.508 ccw(c117.457,105.047) v1@117.838,104.666
Q4-B: C11.1 D2.1 Q1.1 | length 19.3
  Top Layer w0.3: C11.1@118.082,113.055 C11.1@118.532,113.505 ; C11.1@118.241,113.562 ccw(c117.839,114.126) 118.532,114.126 ; C11.1 C11.1@118.532,113.505 ; C11.1@118.822,113.562 cw(c119.224,114.126) 118.532,114.126 ; 120.805,114.716 D2.1 ; 124.036,111.828 ccw(c125.131,112.923) Q1.1@125.131,111.375 ; D2.1@124.353,114.469 ccw(c123.755,113.871) 123.755,114.716 ccw(c123.755,115.561) D2.1@124.353,114.964 ; 124.548,111.316 ccw(c125.131,111.899) Q1.1@125.131,111.075 ; Q1.1 124.814,111.05 123.8,112.065 122.606,112.065 121.818,112.852 121.818,114.275 121.379,114.714 119.119,114.714 118.532,114.126 ; C11.1@118.532,113.505 118.532,114.126
R1R: R3.2 RT1.1 | length 7
  Top Layer w0.4: R3.2@125.361,103.309 125.361,103.745 126.98,105.364 ; R3.2@125.7,103.409 cw(c127.331,103.409) 126.178,104.562
  Top Layer w0.7: 126.98,105.364 RT1.1 ; RT1.1@128.36,105.134 ccw(c127.805,104.58) 127.805,105.364 ccw(c127.805,106.149) RT1.1@128.36,105.594 ; RT1.1@128.572,105.382 RT1.1@128.704,105.382
R5: D2.2 R5.2 | length 17.3
  Top Layer w0.3: 115.773,118.262 118.288,115.748 125.959,115.748 ; D2.2@126.019,114.925 ccw(c125.512,115.301) 125.959,115.748 ; D2.2@126.161,115.011 ccw(c125.939,115.356) 126.35,115.356 ; 126.204,115.502 cw(c125.794,115.092) D2.2@126.26,114.746 ; D2.2 126.35,115.356 ; 126.45,115.256 cw(c126.076,114.882) D2.2@126.501,114.567 ; D2.2@126.539,115.011 cw(c126.76,115.356) 126.35,115.356 ; 125.959,115.748 126.35,115.356
  Top Layer w0.7: R5.2@114.275,118.567 115.468,118.567 115.773,118.262
RST: C9.2 Q1.3 R6.2 RST.1 U1.4 U1.9 | length 90.4
  Top Layer w0.254: U1.9 108.016,108.824 v1(108.255,108.585) ; U1.4 106.985,112.075 107.02,112.039 107.798,112.039 v1(108.255,111.582) 108.661,111.989 108.661,114.046 107.848,114.859 v1@107.544,114.859 ; U1.4@107.025,112.123 ccw(c107.226,112.324) 107.226,112.039 ; U1.9@107.139,108.824 cw(c107.139,107.47) v1@108.097,108.427 ; v1@107.721,114.763 cw(c107.721,114.224) 108.102,114.605 cw(c108.483,114.986) v1@107.944,114.986 ; 107.753,108.824 cw(c107.753,108.083) v1@108.277,108.607 ; v1@108.032,111.582 ccw(c107.493,111.582) 107.874,111.963 ccw(c108.255,112.344) 108.255,111.805 ccw(c108.255,112.344) 108.635,111.963 ccw(c109.016,111.582) v1@108.478,111.582
  Top Layer w0.4: C9.2@123.6,97.2 cw(c124.526,97.2) 123.871,97.855 ; C9.2@123.65,97.634 R6.2@125.35,99.333 ; C9.2@124,97.2 cw(c125.892,97.2) 124.554,98.538 ; Q1.3@124.181,108.91 124.592,109.322 ; Q1.3@124.42,108.646 cw(c125.075,108.839) 124.592,109.322 ; 124.635,98.618 ccw(c123.753,99.5) R6.2@125,99.5 ; 127.559,109.322 124.592,109.322
  Top Layer w0.6: C9.2@123.65,97.5 C9.2@123.65,97.634 ; R6.2@125.259,99.641 ccw(c124.808,100.092) 125.445,100.092 ; R6.2@125.35,99.333 R6.2 ; R6.2@125.445,99.5 v1(125.445,101.707)
  Top Layer w0.7: 127.559,109.322 v1@128.092,109.855
  Bottom Layer w0.254: v1@107.721,114.763 cw(c107.721,114.224) 108.102,114.605 cw(c108.483,114.986) v1@107.944,114.986 ; v1(107.721,114.986) 111.836,110.871 114.986,110.871 115.57,110.287 115.57,108.991 116.586,107.975 118.306,107.975 123.101,103.18 125.445,103.18 ; v1@108.097,108.743 ccw(c107.716,109.123) 108.255,109.123 ccw(c108.793,109.123) v1@108.412,108.743 ; v1@108.097,111.425 cw(c107.716,111.044) 108.255,111.044 cw(c108.793,111.044) v1@108.412,111.425 ; v1(108.255,108.585) v1(108.255,111.582) ; RST.1 RST.1@119.865,93.889 ; 120.452,93.302 120.745,93.009 124.229,93.009 124.275,92.964 127.991,92.964 128.877,93.85 128.877,98.275 v1(125.445,101.707) 125.445,103.18 ; v1@125.288,101.865 ccw(c124.907,102.245) 125.445,102.245 ccw(c125.984,102.245) v1@125.603,101.865 ; v1@125.445,101.484 cw(c125.445,100.946) 125.826,101.326 cw(c126.207,101.707) v1@125.668,101.707 ; v1@127.935,109.672 cw(c127.554,109.291) 128.092,109.291 cw(c128.631,109.291) v1@128.25,109.672 ; v1(128.092,109.83) 128.092,109.093 128.877,108.308 128.877,104.315 127.742,103.18 125.445,103.18
  Bottom Layer w0.7: RST.1@119.572,93.782 cw(c119.572,92.816) 120.255,93.499 cw(c120.938,94.182) RST.1@119.972,94.182 ; RST.1@119.865,93.889 120.452,93.302
RT2: RT2.2 RT2.3 U1.18 | length 41.2
  Top Layer w0.254: U1.18 114.682,112.725 115.418,111.989 v1@115.697,111.989 ; v1@115.296,111.887 ccw(c114.758,111.887) 115.139,112.268 ccw(c115.519,112.648) v1@115.519,112.11 ; RT2.3@129.484,101.573 RT2.3
  Top Layer w0.7: v1@127.127,103.911 130.49,100.548 RT2.2 ; 128.74,102.298 ccw(c129.54,103.098) RT2.3@129.54,101.967 ; RT2.3@128.785,102.253 cw(c128.049,101.517) RT2.3@129.09,101.517 ; RT2.3@129.228,101.193 cw(c126.375,98.227) RT2.2@130.49,98.227 ; RT2.3@129.54,101.067 cw(c129.54,100.026) RT2.3@130.276,100.762 ; RT2.3@129.713,101.697 cw(c127.957,99.872) 130.49,99.872 ; RT2.3@129.99,101.517 ccw(c131.122,101.517) 130.321,100.717 ; RT2.2@130.209,98.53 ccw(c129.636,98.86) RT2.2@130.275,99.031 ; 130.229,99.2 ccw(c131.107,99.435) RT2.2@130.653,98.648 ; RT2.2@130.26,98.597 ccw(c129.705,99.152) 130.49,99.152 ccw(c131.275,99.152) RT2.2@130.72,98.597
  Bottom Layer w0.254: v1@115.519,111.664 cw(c115.519,111.126) 115.9,111.506 cw(c116.281,111.887) v1@115.742,111.887 ; v1(115.519,111.887) 116.103,111.303 116.103,109.245 116.865,108.483 118.516,108.483 123.311,103.688 126.904,103.688 v1@127.127,103.911 ; 126.101,103.688 ccw(c126.101,104.988) v1@127.02,104.069 ; 126.714,103.688 ccw(c126.714,104.375) v1@127.2,103.889
  other v1: 127.178,103.911
SCK: U1.15 Z1.4 Z2.4 | length 33.2
  Top Layer w0.254: v1@107.391,97.962 ccw(c107.391,98.439) 107.729,98.102 ; v1@107.391,98.216 ccw(c107.391,99.306) 108.162,98.536 ; v1@107.465,98.204 ccw(c107.756,99.032) 108.195,98.272 ; 107.893,98.266 cw(c108.771,97.388) Z1.4@108.844,98.628 ; 108.293,98.666 cw(c108.816,98.144) Z1.4@108.859,98.882 ; Z1.4@108.596,98.51 ccw(c108.299,98.317) 108.299,98.672 ccw(c108.299,99.027) Z1.4@108.596,98.834 ; Z1.4@108.829,98.375 ccw(c108.727,96.632) 107.493,97.866 108.299,98.672 Z1.4 ; 111.169,98.672 111.379,98.882 114.478,98.882 115.824,100.228 115.824,101.168 116.053,101.397 116.053,105.816 116.434,106.197 116.434,109.423 115.154,110.703 112.719,110.703 U1.15 ; U1.15@113.575,110.823 ccw(c113.864,111.111) 113.864,110.703
  Top Layer w0.6: Z1.4 111.169,98.672
  Bottom Layer w0.254: v1@107.366,97.992 Z2.4 ; v1@107.549,97.836 cw(c107.927,97.458) 107.927,97.992 ; v1@107.549,98.151 ccw(c107.932,98.534) 107.932,97.992 ; Z2.4@108.636,97.781 ccw(c108.127,97.273) 108.127,97.992 ccw(c108.127,98.711) Z2.4@108.636,98.203
  other v1: 107.391,97.993
SWIM: RST.3 U1.3 | length 33.1
  Top Layer w0.254: U1.3 107.721,112.725 107.772,112.776 107.798,112.751 107.874,112.751 v1(107.899,112.776) ; 107.237,112.725 ccw(c107.237,113.439) v1@107.742,112.934 ; 107.485,112.725 cw(c107.485,112.362) v1@107.742,112.618
  Bottom Layer w0.254: v1(107.899,112.776) 107.874,112.751 107.798,112.751 107.772,112.776 108.433,112.776 ; v1@108.058,112.619 cw(c108.433,112.25) 108.433,112.776 ; v1@108.058,112.933 ccw(c108.433,113.302) 108.433,112.776 ; 124.652,95.582 124.652,96.76 122.276,99.136 116.383,99.136 115.697,99.822 115.697,103.835 115.532,104 115.525,104 112.566,106.959 112.566,108.643 108.433,112.776
  Bottom Layer w1: RST.3 124.652,95.582
T-LED: R9.1 U1.20 | length 18.8
  Top Layer w0.254: U1.20 112.897,114.275 114.706,114.275 115.367,114.935 ; U1.20@113.378,114.135 cw(c113.654,113.931) 113.654,114.275 ; U1.20@113.396,114.156 cw(c113.682,113.87) 113.682,114.275 ; U1.20@113.575,113.977 cw(c114.295,113.257) 114.295,114.275 ; U1.20@113.582,113.984 cw(c114.157,113.56) 114.157,114.275 ; v1@115.68,114.79 ccw(c115.367,114.524) 115.367,114.935 ; v1@115.68,115.08 cw(c115.367,115.346) 115.367,114.935 ; v1(115.849,114.935) 115.367,114.935
  Top Layer w0.7: 123.48,113 cw(c123.48,114.056) v1(122.733,113.309) 123.042,113 R9.1
  Bottom Layer w0.254: v1@115.621,114.935 v1(115.849,114.935) 115.976,115.062 120.98,115.062 v1(122.733,113.309) ; v1@116.007,114.777 cw(c116.694,114.09) 116.694,115.062 ; v1@122.51,113.309 ccw(c121.971,113.309) 122.352,113.69 ccw(c122.733,114.071) v1@122.733,113.532
TEMP: 
YS: C7.1 R2.1 U1.5 YS.2 | length 28.8
  Top Layer w0.254: 93.497,112.243 96.926,112.243 97.663,111.506 97.663,110.58 ; v1(104.394,111.582) 104.552,111.425 U1.5 ; v1@104.552,111.74 ccw(c105.313,112.501) U1.5@105.313,111.425
  Top Layer w0.7: R2.1@97.663,107.8 97.663,108.727 97.663,110.58
  Top Layer w0.9: YS.2@90.947,112.192 93.243,112.192
  Bottom Layer w0.254: YS.2@91.172,112.268 103.708,112.268 v1(104.394,111.582) ; YS.2@91.867,111.945 cw(c92.648,111.164) 92.648,112.268 ; YS.2@91.867,112.444 ccw(c92.292,112.868) 92.292,112.268 ; v1@104.171,111.582 ccw(c103.633,111.582) 104.013,111.963 ccw(c104.394,112.344) v1@104.394,111.805
YSD: U1.2 YS.1 | length 16.3
  Top Layer w0.254: v1@104.394,113.544 cw(c104.394,113.005) 104.775,113.386 cw(c105.155,113.767) v1@104.617,113.767 ; v1(104.394,113.767) 104.786,113.374 U1.2
  Bottom Layer w0.4: 93.218,113.741 101.073,113.746 104.374,113.746 v1(104.394,113.767) ; 103.983,113.746 ccw(c103.983,114.178) v1@104.288,113.873
  Bottom Layer w0.9: YS.1@91.172,113.746 93.218,113.741
ZL+: 

## Polygon pours and split planes (outlines as drawn)
GND on Bottom Layer "Top Layer-No Net" (solid, remove dead copper, pour order 3): 181.27,130.858 181.325,130.803 181.981,130.803 181.981,130.752 182.006,130.727 182.044,130.689 182.044,130.363 182.044,128.074 182.082,128.037 182.59,127.534 182.59,126.855 182.895,126.855 183.759,126 183.927,125.834 184.544,125.834 185.979,125.834 186.045,125.9 186.111,125.834 186.284,125.834 186.416,125.834 186.527,125.724 186.684,125.568 186.684,125.438 186.684,102.362 186.705,102.342 186.604,102.241 186.604,101.537 186.301,101.537 186.123,101.36 184.495,101.36 184.495,99.282 184.394,99.181 184.394,98.947 184.271,98.947 184.108,98.787 181.361,98.787 181.193,98.621 181.041,98.771 158.366,98.771 158.366,125.721 158.46,125.814 158.323,125.95 148.062,125.95 148.062,129.985 148.1,130.023 147.945,130.177 147.945,130.627 148.378,130.627 148.6,130.847 148.611,130.858 181.544,130.858
GND on Top Layer "Top Layer-No Net" (hatched 90Degree grid 0.508 track 0.203, remove dead copper, pour order 4): 184.912,104.681 184.968,104.625 185.622,104.625 185.622,104.574 185.647,104.549 185.685,104.511 185.685,104.181 185.685,101.869 185.723,101.831 186.23,101.323 186.23,100.637 186.534,100.637 187.396,99.774 187.564,99.606 188.18,99.606 189.612,99.606 189.678,99.672 189.744,99.606 189.917,99.606 190.048,99.606 190.159,99.494 190.316,99.337 190.316,99.206 190.316,75.893 190.337,75.872 190.235,75.771 190.235,75.059 189.934,75.059 189.755,74.881 188.131,74.881 188.131,72.781 188.03,72.679 188.03,72.443 187.907,72.443 187.745,72.281 185.003,72.281 184.836,72.113 184.684,72.265 162.054,72.265 162.054,99.491 162.148,99.585 162.011,99.723 151.77,99.723 151.77,103.799 151.808,103.838 151.653,103.993 151.653,104.447 152.085,104.447 152.307,104.67 152.318,104.681 185.186,104.681

## Keep-outs
Keep-Out Layer:
  circle w0.1: c130.466,93.302 r1.15
  circle w0.1: c120.966,118.482 r1.15
  circle w0.1: c92.01,107.95 r1.15
  lines w0.1: 90.472,90.982 91.896,90.982 ; 90.472,90.99 cw(c90.472,91.69) 89.772,91.69 89.772,115.207 cw(c90.272,115.207) 90.272,115.707 91.792,115.707 ccw(c91.792,118.207) 94.292,118.207 ; 91.896,88.882 91.896,90.983 ; 91.897,88.882 ccw(c92.397,88.882) 92.397,88.382 130.072,88.382 ccw(c130.072,88.882) 130.572,88.882 ; 94.288,118.207 94.288,120.071 cw(c94.788,120.071) 94.788,120.571 ; 94.797,120.582 127.732,120.582 cw(c127.732,120.082) 128.232,120.082 ; 128.237,120.082 128.237,118.207 ccw(c130.737,118.207) 130.737,115.707 ; 130.583,88.882 130.583,90.982 131.972,90.982 ; 130.732,115.707 132.172,115.707 cw(c132.172,115.207) 132.672,115.207 132.672,91.644 ; 131.972,90.99 ccw(c131.972,91.69) 132.672,91.69 ; 91.059,93.117 91.648,92.38 102.616,92.38 103.327,93.091 103.327,104.394 102.565,105.156 91.897,105.156 91.059,104.318 91.059,93.117

## Silkscreen, mask and mechanical layers (free items; w line width, h text height)
Top Overlay:
  lines w0.127: 92.202,92.126 107.544,92.126 ; 103.581,104.038 107.62,104.038 ; 117.45,105.207 120.396,105.207 120.396,106.782 117.45,106.782 117.45,105.232 ; 106.731,104.572 106.731,106.248 109.677,106.248 109.677,104.572 106.731,104.572
  lines w0.2: 106.611,90.63 106.611,90.98 ; 106.615,90.91 cw(c106.962,90.93) 107.311,90.93 ; 107.34,90.91 cw(c107.687,90.93) 108.036,90.93 ; 108.061,90.93 cw(c108.408,90.949) 108.756,90.949 ; 108.79,90.935 cw(c109.137,90.955) 109.486,90.955 109.486,90.678
  lines w0.3: 112.039,119.634 114.986,119.634 ; 117.958,114.249 120.904,114.249 ; 122.707,111.887 125.654,111.887 ; 124.054,115.697 127,115.697
  text "IRQ" at 111.1,102.184 h0.7
  text "Z:12Q" at 90.78,102.108 h0.7 r90
  text "MISO" at 111.074,100.94 h0.7
  text "MOSI" at 111.023,99.771 h0.7
  text "SCK" at 111.1,98.374 h0.7
  text "3.3" at 126.594,97.739 h0.9 r270
  text "O:45mm" at 90.754,97.358 h0.7 r90
  text "CSN" at 111.15,97.104 h0.7
  text "R" at 119.024,96.215 h0.9 r270
  text "CE" at 111.15,95.834 h0.7
  text "GND" at 111.074,94.513 h0.7
  text "3V" at 111.074,93.218 h0.7
  text "X:0.25" at 90.78,92.862 h0.7 r90
  text "+" at 94.767,89.154 h2
  text "L" at 107.696,88.925 h1
  text "+" at 126.035,88.875 h2
Bottom Overlay:
  lines w0.127: 92.05,92.05 105.004,92.05 ; 103.073,104.064 105.74,104.064
  lines w0.16: 107.772,93.548 110.82,93.548 ; 113.843,92.989 114.91,92.989 115.062,93.142 115.062,101.651 114.808,101.905 113.995,101.905 ; 113.894,94.158 115.468,94.158 115.545,94.234 115.545,102.972 115.316,103.2 114.046,103.2
  text "FL" at 100.762,118.059 h1.2
  text "YS" at 95.275,112.246 h1.2
  text "20190701HFCC" at 131.343,109.957 h1 r90
  text "GND" at 111.277,102.667 h0.85
  text "3V3" at 111.303,101.498 h0.85
  text "CE" at 111.328,100.228 h0.85
  text "CSN" at 111.303,98.882 h0.85
  text "SWIM" at 125.095,98.527 h0.85 r90
  text "3V3" at 127.61,98.019 h0.85 r90
  text "GND" at 122.58,97.917 h0.85 r90
  text "RST" at 119.964,97.841 h0.85 r90
  text "SCK" at 111.303,97.663 h0.85
  text "MOSI" at 111.328,96.317 h0.85
  text "MISO" at 111.328,94.971 h0.85
  text "IRQ" at 111.328,93.777 h0.85
  text "GND" at 111.201,92.507 h0.85
  text "+" at 127.406,89.56 h2
  text "+" at 97.028,89.103 h2
  text "GND" at 113.944,88.671 h0.85
  text "GND" at 103.759,88.646 h0.85

## Dimensions
89.772,115.207 to 132.672,115.207 on Top Overlay
94.797,120.582 to 92.397,88.382 on Top Overlay